# Altium PCB PCB.PcbDoc
Units mil, origin at the board's own origin, x right, y up, seen from the top; angles counter-clockwise.
Board outline 866.67 x 613.96 mil, 2 copper layers (Top Layer, Bottom Layer), stack 21 mil thick; 2 components, 6 nets, 36 pads, 16 vias.
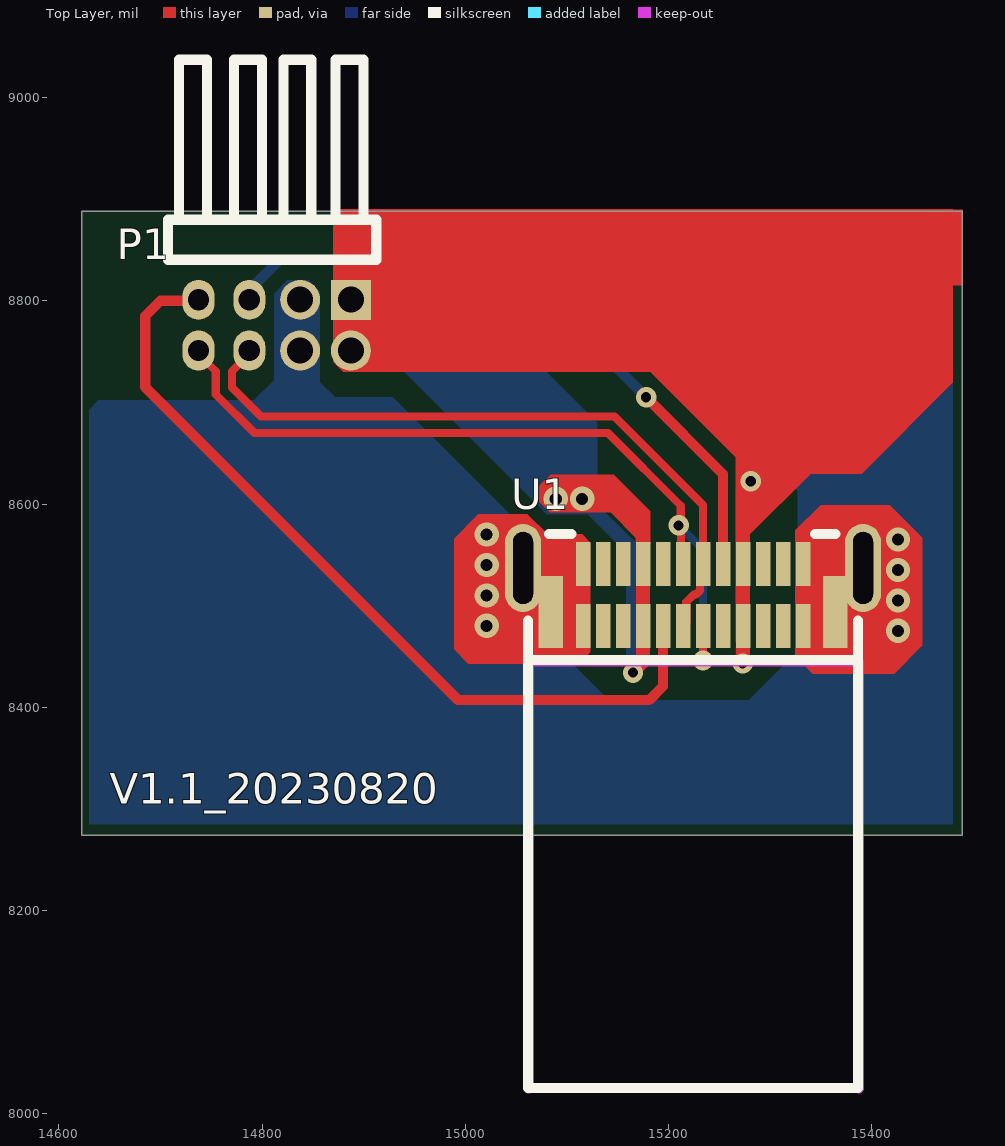
[diagram p0: Top Layer view]
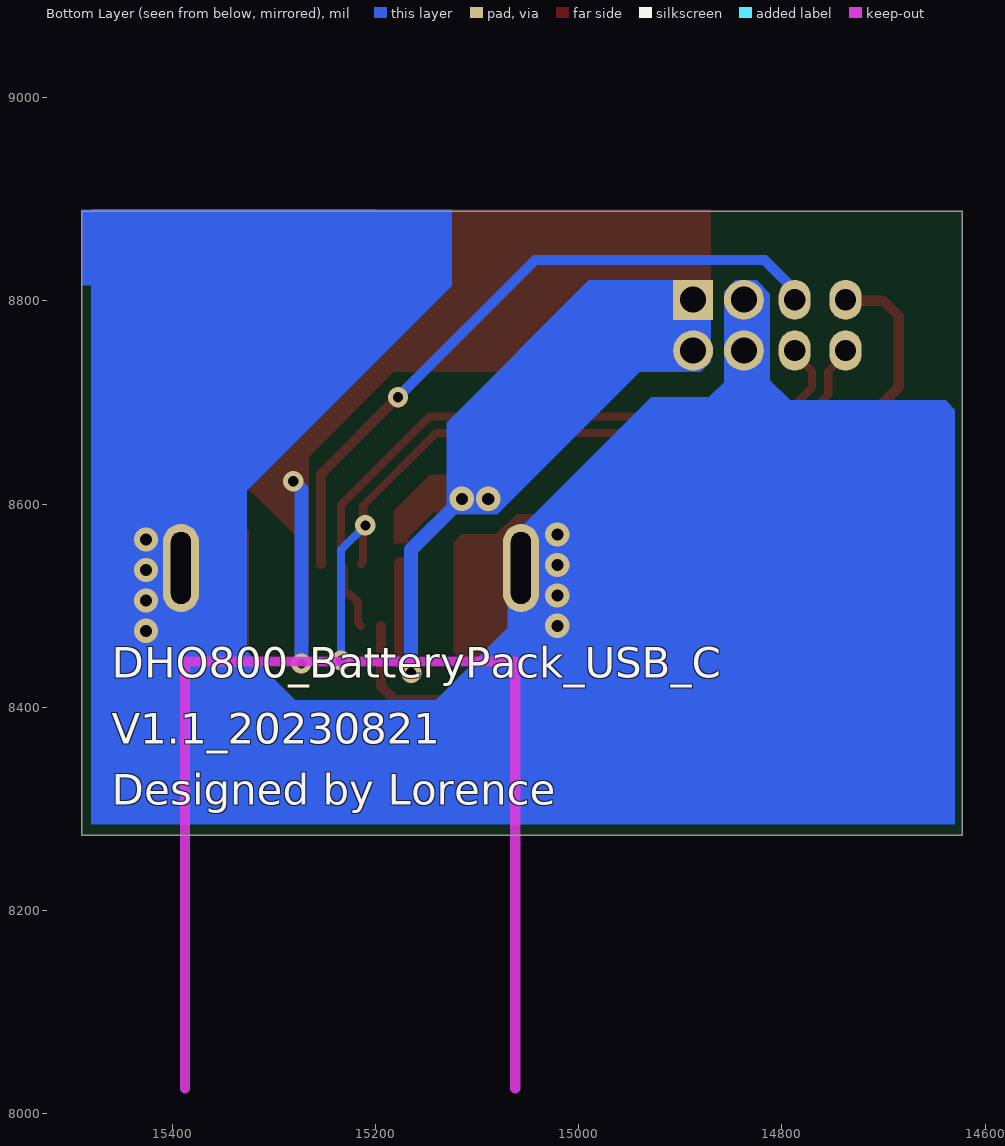
[diagram p1: Bottom Layer view, seen from below]

## Layer stack, top to bottom
Top Solder: solder mask 0.4, Solder Resist, Dk 3.5
Top Layer: signal copper 1.4
Dielectric 2: prepreg 2.8, PP-006, Dk 4.1
Dielectric 1: dielectric 12.6, FR-4, Dk 4.8
Dielectric 3: prepreg 2.8, PP-006, Dk 4.1
Bottom Layer: signal copper 1.4
Bottom Solder: solder mask 0.4, Solder Resist, Dk 3.5

## Board outline
14622.51,8274.39 ccw(c14622.78,8274.39) 14622.78,8274.12 15488.92,8274.12 ccw(c15488.92,8274.39) 15489.19,8274.39 15489.19,8887.82 ccw(c15488.92,8887.82) 15488.92,8888.08 14895.31,8888.08 ccw(c14895.31,8887.82) 14895.07,8887.92 14779.83,8887.92 ccw(c14779.58,8887.82) 14779.58,8888.08 14745.33,8888.08 ccw(c14745.33,8887.82) 14745.09,8887.92 14729.82,8887.92 ccw(c14729.57,8887.82) 14729.57,8888.08 14622.78,8888.08 ccw(c14622.78,8887.82) 14622.51,8887.82

## Design rules (kind name [scope] priority, off if disabled: settings)
Clearance [All] p1: gap=4 ignorepadtopadclearanceinfootprint=FALSE
DiffPairsRouting [All] p1: maxlimit=8 minlimit=8 mostfreqgap=8 toplayer_minwidth=6 toplayer_maxwidth=8 toplayer_prefwidth=8 bottomlayer_minwidth=6 bottomlayer_maxwidth=8 bottomlayer_prefwidth=8 maxuncoupledlength=500
HoleSize [All] p1: absolutevalues=TRUE maxlimit=1000 minlimit=1 maxpercent=80.000 minpercent=20.000
HoleToHoleClearance [All] p1: gap=0 allowstackedmicrovias=TRUE
MinimumSolderMaskSliver [All] p1: minsoldermaskwidth=0
PlaneConnect [All] p1: planeconnectstyle=Direct reliefexpansion=20 reliefentries=4 reliefconductorwidth=10 reliefairgap=10
PolygonConnect [All] p1: connectstyle=Relief reliefconductorwidth=10 reliefentries=4 polygonreliefangle="90 Angle" airgapwidth=10
RoutingVias [All] p1: holewidth=10 width=20 viastyle="Through Hole" minholewidth=10 minwidth=20 maxholewidth=500 maxwidth=500
SilkToSilkClearance [All] p1: silktosilkclearance=0
SilkToSolderMaskClearance [IsPad] p1: minsilkscreentomaskgap=0 clearancetoexposedcopper=TRUE
SolderMaskExpansion [All] p1: expansion=4 istentingtop=FALSE
Width [All] p1: maxlimit=1000 minlimit=8 preferedwidth=10
23 further rules are at their usual default settings.

## Classes and differential pairs
differential pair BUSB: +BUSB_P -BUSB_N

## Components (designator, comment, footprint, x,y, rotation, side; value= is the part's Value field where it differs from the comment)
P1 "X1321WR-2x07J-C40D18" HDR-TH_8P-P1.27-L 14812.44,8776.04 r180 top locked
U1 "TYPEC-951-ARP24" USB-C-SMD_TYPEC-951-ARP24 15224.22,8510.51 r0 top locked

## Footprints (in the part's own frame and the unit in brackets; to place one, negate y for a bottom-side part, rotate by r counter-clockwise, add the part's x,y. Pads: shape width x height; smd on the part's side, far side on the other; paste and mask are expansions set on the pad)
HDR-TH_8P-P1.27-L [mm]
  rect 1x1 hole 0.65: 1(-1.905,-0.635)
  round 1 hole 0.65: 2(-1.905,0.635) 3(-0.635,-0.635) 4(-0.635,0.635)
  oval 0.8x1 hole 0.53: 5(0.635,-0.635) 6(0.635,0.635) 7(1.905,-0.635) 8(1.905,0.635)
  silkscreen extent -2.54,-6.63 2.67,-1.63
USB-C-SMD_TYPEC-951-ARP24 [mm]
  rect 0.61x1.8 smd paste-100 mask+0.05: 25(-3.555,-0.425) 25(3.555,-0.425)
  oval 0.9x2.2 hole 0.5 slot 1.8 at 90 deg paste+0 mask+0.05: 26(-4.25,0.675) 26(4.25,0.675)
  rect 0.36x1.1 smd paste-100 mask+0.05: A1(2.75,0.775) A2(2.25,0.775) A3(1.75,0.775) A4(1.25,0.775) A5(0.75,0.775) A6(0.25,0.775) A7(-0.25,0.775) A8(-0.75,0.775) A9(-1.25,0.775) A10(-1.75,0.775) A11(-2.25,0.775) A12(-2.75,0.775) B1(-2.75,-0.775) B2(-2.25,-0.775) B3(-1.75,-0.775) B4(-1.25,-0.775) B5(-0.75,-0.775) B6(-0.25,-0.775) B7(0.25,-0.775) B8(0.75,-0.775) B9(1.25,-0.775) B10(1.75,-0.775) B11(2.25,-0.775) B12(2.75,-0.775)
  Keep-Out Layer lines w0.254: -4.108,-1.664 -4.108,-12.332 -4.108,-1.664 ; -4.108,-1.664 4.147,-1.664 ; -4.108,-1.664 4.147,-1.664 ; 4.147,-1.664 4.147,-12.332 4.147,-1.664
  silkscreen extent -4.13,-12.33 4.12,1.52

## Part data
P1: library part 双排插针, "双排弯针2*4P", Current Rating (Max)=1A, JLCPCB Part Class="Extended Part", LCSC Part Name="1.27mm 2x7P 弯插 方针", Manufacturer="XKB Connectivity(中国星坤)", Operating Temperature Range=-40℃~+105℃, Voltage Rating (Max)=250V, Welding Temperature (Max)=260℃, Add into BOM=yes, Circluar Pins/Square Pins=方针, Contact Material=黄铜, Contact Plating=金, Convert to PCB=yes, Device=X1321WR-2x07J-C40D18, Insulation Height=1mm, Length of End Connection Pin=-, Length of Mating Pin=4mm, Manufacturer Part=X1321WR-2x07J-C40D18, Mounting Type=弯插, Name=X1321WR-2x07J-C40D18, Number of Pins=14, Number of Rows=2, Pin Structure=2x7P, Pitch=1.27mm, Row Spacing=1.27mm, Supplier=LCSC, Supplier Footprint=插件,P=1.27mm, Supplier Part=C2881827, Symbol=X1321WR-2X07J-C40D18
U1: "USB C公头", Current Rating - Power (Max)=3A, JLCPCB Part Class="Extended Part", LCSC Part Name="Type-C 公头 卧贴", Manufacturer=XUNPU(讯普), Operating Temperature Range=-45℃~+85℃, Welding Temperature (Max)=260℃, Add into BOM=yes, Connector Type=Type-C, Convert to PCB=yes, Datasheet=2022-06-27/563699A/5b3ef206478045388967090afecc516d/C2856663_TYPE-C公头卧贴_2021-07-23.PDF, Device=TYPEC-951-ARP24, Gender=公头, Manufacturer Part=TYPEC-951-ARP24, Mounting Style=卧贴, Name=TYPEC-951-ARP24, Number of Contacts=24, Number of Ports=1, Standard="USB 3.1", Supplier=LCSC, Supplier Footprint=SMD,13.75x8.25x2.40mm, Supplier Part=C2856663, Symbol=TYPEC-951-ARP24

## Via types
v1: diameter 24, hole 12, Top Layer to Bottom Layer, tented both sides, 10 vias
v2: diameter 20, hole 10, Top Layer to Bottom Layer, tented both sides, 6 vias

## Nets (pads, with @x,y where several pads share a name; then routed paths per layer and width w, separated by ;. In a path a pad name is that pad's centre, name@x,y a point inside that pad or via, vN(x,y) a via of type N, cw(c..) or ccw(c..) an arc to the next point about the centre after c; other vN are vias at no path point)
BUSB_N: P1.8 U1.A7 U1.B7 | length 790.2
  Top Layer w8: P1.8 14737.44,8747.67 14754.44,8730.67 14754.44,8707.93 14792.37,8670 15140.37,8670 15212.13,8598.25 15212.13,8581.13 v2(15210,8579) 15212.18,8576.82 15212.18,8543.2 U1.A7 ; v2(15234,8446) U1.B7@15234.03,8479.97
  Bottom Layer w8: v2(15210,8579) 15234,8555 v2(15234,8446)
BUSB_P: P1.6 U1.A6 U1.B6 | length 683.3
  Top Layer w8: P1.6 14787.44,8747.67 14770.44,8730.67 14770.44,8714.56 14799,8686 15147,8686 15234.06,8598.94 U1.A6 15230.97,8537.93 15230.97,8514.97 15227,8511 15225.01,8511 15217.46,8503.45 15217.46,8483.09 U1.B6
CC3: P1.5 U1.A5 | length 667.4
  Top Layer w10: P1.5 P1.5@14787.44,8804.97 ; v2(15178,8705) 15253.74,8629.26 U1.A5
  Bottom Layer w10: P1.5 14787.44,8810.44 14817,8840 15043,8840 v2(15178,8705)
CC4: P1.7 U1.B5 | length 831.3
  Top Layer w10: P1.7 14736.4,8800 14700,8800 14685,8785 14685,8715 14993,8407 15181,8407 15194.69,8420.69 U1.B5
GND: P1.3 P1.4 U1.25 U1.26 U1.A1 U1.A12 U1.B1 U1.B12
  other v1: 15425.89,8475.08 15021,8480 15425.89,8505.08 15021,8510 15425.89,8535.08 15021,8540 15425.89,8565.08 15021,8570
VIN: P1.1 P1.2 U1.A4 U1.A9 U1.B4 U1.B9 | length 523
  Top Layer w14: v2(15165,8434) 15165,8434.97 15175,8444.97 U1.B4 U1.A9 ; v2(15273,8443) 15273.43,8443 U1.B9
  Bottom Layer w14: v1(15115,8605) 15165,8555 v2(15165,8434) ; v2(15273,8443) 15273,8614.38 v2(15281,8622.38)
  other v1: 15089,8605
pads on no net: U1.A2 U1.A3 U1.A8 U1.A10 U1.A11 U1.B2 U1.B3 U1.B8 U1.B10 U1.B11

## Other copper
Top Layer:
  rectangle net VIN: 15125,8815 15490,8890
  region net VIN: 15182,8561 15182,8593 15146,8629 15084,8629 15073,8618 15073,8602 15083,8592 15143,8592 15168,8567 15168,8562
  region net GND: 15061,8590 15081,8570 15115,8570 15123,8562 15123,8454 15112,8443 15003,8443 14989,8457 14989,8566 15013,8590
  region net GND: 15325,8574 15350,8599 15418,8599 15450,8567 15450,8461 15422,8433 15342,8433 15325,8450
  region net VIN: 15182,8730 14880,8730 14870,8740 14870,8890 15480,8890 15480,8720 15390,8630 15340,8630 15280,8570 15280,8465 15275,8460 15270,8460 15266,8464 15266,8646
Bottom Layer:
  rectangle net GND: 15125,8815 15490,8890
  region net GND: 14812,8722 14792,8702 14639,8702 14630,8693 14630,8285 15480,8285 15480,8890 15200,8890 15125,8815 15327,8613 15327,8455 15279,8407 15141,8407 15070,8478 15070,8500 15055,8515 15055,8578.42 14928.42,8705 14872,8705 14857,8720 14857,8809 14846,8820 14825,8820 14812,8807
  region net VIN: 14990,8820 15130,8680 15130,8595 15125,8590 15080,8590 14940,8730 14880,8730 14870,8740 14870,8810 14880,8820

## Silkscreen, mask and mechanical layers (free items; w line width, h text height)
Top Overlay:
  text "V1.1_20230820" at 14650,8305 h30
Bottom Overlay:
  text "DHO800_BatteryPack_USB_C" at 15459.49,8429.21 h30
  text "V1.1_20230821" at 15459.49,8364.21 h30
  text "Designed by Lorence" at 15459.49,8304.21 h30
Top Solder:
  rectangle: 15125,8815 15490,8890
Bottom Solder:
  rectangle: 15125,8815 15490,8890
Mechanical 1:
  lines w0.5: 14720.31,8887.65 14904.57,8887.65 ; 14729.57,8887.82 14622.78,8887.82 14622.78,8274.39 14994.41,8274.39 15336.94,8274.39 15488.92,8274.39 15488.92,8887.82 14895.31,8887.82 ; 14745.33,8887.82 14779.58,8887.82
Mechanical 2:
  drawing of 202 lines, arcs and shapes, not listed
Mechanical 3:
  lines w0.5: 14729.57,8758.91 14745.31,8758.91 ; 14729.57,8793.17 14745.31,8793.17 ; 14729.57,8808.91 14745.31,8808.91 ; 14729.57,8848.28 14729.57,8887.65 ; 14729.57,8887.82 14745.33,8887.82 ; 14729.57,8895.71 14729.57,8958.68 ; 14745.31,8848.28 14745.31,8887.65 ; 14745.31,8895.69 14745.31,8958.68 ; 14779.57,8758.91 14795.31,8758.91 ; 14779.57,8793.17 14795.31,8793.17 ; 14779.57,8808.91 14795.31,8808.91 ; 14779.57,8848.28 14779.57,8887.65 ; 14779.57,8895.69 14779.57,8958.68 ; 14779.58,8887.82 14795.31,8887.82 ; 14795.31,8848.3 14795.31,8887.67 ; 14795.31,8895.69 14795.31,8958.69 ; 14829.57,8758.91 14845.31,8758.91 ; 14829.57,8793.17 14845.31,8793.17 ; 14829.57,8808.91 14845.31,8808.91 ; 14829.57,8848.29 14829.57,8887.66 ; 14829.57,8887.82 14845.33,8887.82 ; 14829.57,8895.7 14829.57,8958.68 ; 14843.21,8958.68 14843.21,9013.8 14845.33,9013.8 ; 14845.31,8848.28 14845.31,8887.65 ; 14845.31,8895.69 14845.31,8958.7 ; 14879.57,8758.91 14895.31,8758.91 ; 14879.57,8793.17 14887.44,8793.17 14887.44,8801.04 ; 14879.57,8808.91 14895.31,8808.91 ; 14879.57,8848.28 14879.57,8887.65 ; 14879.57,8895.69 14879.57,8958.7 ; 14879.58,8887.82 14895.31,8887.82 ; 14879.58,9013.8 14895.32,9013.8 ; 14895.31,8848.29 14895.31,8887.66 ; 14895.31,8895.69 14895.31,8958.68 ; 15045.31,8895.69 15045.31,8958.68 ; 15062.44,8736.8 15062.44,8848.28 ; 15236.52,8958.68 15236.52,8939.16 15708.96,8939.16 15708.96,8958.68 ; 15305.42,8887.82 15305.42,8730.26 15315.26,8730.26 15325.1,8730.26 15325.1,8887.82 ; 15305.42,8895.7 15305.42,8939.16 ; 15325.1,8895.69 15325.1,8939.16 ; 15384.16,8887.82 15384.16,8730.26 15394,8730.26 15403.84,8730.26 15403.84,8887.84 ; 15384.16,8895.69 15384.16,8939.16 ; 15403.84,8895.69 15403.84,8939.16 ; 15462.9,8887.82 15462.9,8730.26 15472.74,8730.26 15482.58,8730.26 15482.58,8887.84 ; 15462.9,8895.69 15462.9,8939.16 ; 15482.58,8895.69 15482.58,8939.16 ; 15541.64,8895.69 15541.64,8939.16 ; 15561.32,8895.69 15561.32,8939.16 ; 15620.38,8895.69 15620.38,8939.16 ; 15640.06,8895.69 15640.06,8939.16 ; 21518.67,5855.85 21534.42,5855.85 ; 21518.67,5890.1 21534.42,5890.1 ; 21518.67,5905.85 21534.42,5905.85 ; 21518.67,5945.22 21518.67,5984.59 ; 21518.67,5984.76 21534.42,5984.76 ; 21534.42,5945.22 21534.42,5984.59 ; 21568.67,5855.85 21584.42,5855.85 ; 21568.67,5890.1 21584.42,5890.1 ; 21568.67,5905.85 21584.42,5905.85 ; 21568.67,5945.23 21568.67,5984.6 ; 21568.68,5984.76 21584.44,5984.76 ; 21584.42,5945.22 21584.42,5984.59 ; 21618.67,5855.85 21634.42,5855.85 ; 21618.67,5890.1 21634.42,5890.1 ; 21618.67,5905.85 21634.42,5905.85 ; 21618.67,5945.22 21618.67,5984.59 ; 21618.69,5984.76 21634.42,5984.76 ; 21634.42,5945.23 21634.42,5984.6 ; 21668.67,5855.85 21684.42,5855.85 ; 21668.67,5890.1 21684.42,5890.1 ; 21668.67,5905.85 21684.42,5905.85 ; 21668.67,5945.23 21668.67,5984.6 ; 21668.67,5984.76 21684.42,5984.76 ; 21684.42,5945.22 21684.42,5984.59 ; 21842.57,5371.32 22185.09,5371.32 ; 21851.55,5833.74 21851.55,5945.22